# EAGLE board Main (EAGLE 9.6.2)

Size 62.23 x 49.53 mm. Coordinates in mm from the lower left corner, seen from the top.
Outline: 0,0 0,1.27
Outline: 0,1.27 0,24.13 2.54,26.67 7.62,26.67 7.62,39.37 2.54,39.37 0,41.91 0,48.26 1.27,49.53 58.42,49.53 62.23,45.72 62.23,2.54 59.69,0 1.27,0 0,1.27
Copper layers (1*16): Top 0.035mm / dielectric 1.5mm / Bottom 0.035mm
Design rules "default": minimum track width 6mil, minimum drill 0.35mm, track to track 6mil, track to pad 6mil, pad to pad 6mil, via to via 6mil, smd to smd 6mil, copper to edge 40mil, drill to drill 6mil, minimum pad ring 10mil, minimum via ring 8mil, stop-mask expansion 4mil, vias tented up to drill 0mil, thermal gap 10mil
Net classes: 1 power: width 0.203 mm

## Footprints (pad centres in the part's own frame; a part is rotated, then mirrored left to right if it is on the bottom)
0805 = smd 0.8 x 1.2: 1 -0.9,0; 2 0.9,0
C1206 = smd 1.6 x 1.8: 1 -1.4,0; 2 1.4,0
153CLV-1010 = smd 4 x 2.5: + 4,0; - -4,0
153CLV-0605 = smd 3.5 x 1.6: + 2.7,0; - -2.7,0
SOD123-2.7X1.6 = smd 1.2 x 1.02: 1 -1.635,0; 2 1.635,0
DO-214AC = smd 1.8 x 2.4: A 2.025,0; C -2.025,0
SOD80 = smd 1.4 x 1.8: 1 -1.7,0; 2 1.7,0
1X05 = drill 1.016 pad 1.88: 1 0,0; 2 2.54,0; 3 5.08,0; 4 7.62,0; 5 10.16,0
TQFP32-08 = smd 1.27 x 0.559: 1 -4.293,2.8; 2 -4.293,2; 3 -4.293,1.2; 4 -4.293,0.4; 5 -4.293,-0.4; 6 -4.293,-1.2; 7 -4.293,-2; 8 -4.293,-2.8; 17 4.293,-2.8; 18 4.293,-2; 19 4.293,-1.2; 20 4.293,-0.4; 21 4.293,0.4; 22 4.293,1.2; 23 4.293,2; 24 4.293,2.8 | smd 0.559 x 1.27: 9 -2.8,-4.293; 10 -2,-4.293; 11 -1.2,-4.293; 12 -0.4,-4.293; 13 0.4,-4.293; 14 1.2,-4.293; 15 2,-4.293; 16 2.8,-4.293; 25 2.8,4.293; 26 2,4.293; 27 1.2,4.293; 28 0.4,4.293; 29 -0.4,4.293; 30 -1.2,4.293; 31 -2,4.293; 32 -2.8,4.293
TO252 = smd 1 x 1.6: 1 -2.28,-4.8; 2 2.28,-4.8 | smd 5.4 x 6.2: TAB 0,2.5
1X07 = drill 1.016 pad 1.88: 1 0,0; 2 2.54,0; 3 5.08,0; 4 7.62,0; 5 10.16,0; 6 12.7,0; 7 15.24,0
LED3MM = drill 0.813 pad 1.676 octagon: A -1.27,0; K 1.27,0
DIL4-SMD = smd 1.6 x 2: 1 -1.27,-4.77; 2 1.27,-4.77; 3 1.27,4.77; 4 -1.27,4.77
SOT23-3 = smd 0.8 x 0.9: 1 -0.95,-1; 2 0.95,-1; 3 0,1.1
SOT23-BEC = smd 1 x 1.4: B -0.95,-1.1; C 0,1.1; E 0.95,-1.1
SOIC127P600X175-14N = smd 1.981 x 0.559: 1 -2.362,3.81; 2 -2.362,2.54; 3 -2.362,1.27; 4 -2.362,0; 5 -2.362,-1.27; 6 -2.362,-2.54; 7 -2.362,-3.81; 8 2.362,-3.81; 9 2.362,-2.54; 10 2.362,-1.27; 11 2.362,0; 12 2.362,1.27; 13 2.362,2.54; 14 2.362,3.81
16P-18.5X13.5X0.8 = smd 1.7 x 1: 1 -6.6,2.15; 2 -6.6,0.65; 3 -6.6,-0.85; 4 -6.6,-2.35; 5 -6.6,-3.85; 6 -6.6,-5.35; 7 -6.6,-6.85; 8 -6.6,-8.35; 9 6.6,-8.35; 10 6.6,-6.85; 11 6.6,-5.35; 12 6.6,-3.85; 13 6.6,-2.35; 14 6.6,-0.85; 15 6.6,0.65; 16 6.6,2.15
SOT223 = smd 1.219 x 2.235: 1 -2.311,-3.099; 2 0,-3.099; 3 2.311,-3.099 | smd 3.6 x 2.2: 4 0,3.099
SRD-05VDC-SL-C = drill 1.2 pad 2.184: COIL0 -5.39,-6.12; COIL1 -5.39,5.88; SWCLOSED 6.61,-6.12; SWCOMMON -7.39,-0.12; SWOPEN 6.61,5.88
RESONATOR-SMD = smd 0.45 x 1.905: 1 -1.2,0; 2 0,0; 3 1.2,0

## Placement (x,y rotation side)
C1  0.1uF  [0805]  33.02,36.83 0 top
C2  10uF  [C1206]  22.86,21.59 0 top
C3  0.1uF  [0805]  33.02,39.37 0 top
C4  22uF  [C1206]  54.61,22.86 90 top
C5  4.7uF  [C1206]  29.21,17.78 180 top
C6  0.1uF  [0805]  33.02,41.91 0 top
C7  0.1uF  [0805]  33.02,44.45 0 top
C8  0.1uF  [0805]  29.21,44.45 0 top
C9  0.1  [0805]  25.4,44.45 0 top
C10  220/50  [153CLV-1010]  41.91,41.91 0 top
C11  100/35  [153CLV-0605]  53.34,43.18 0 top
C12  0.1uF  [0805]  21.59,44.45 0 top
C13  0.1uF  [0805]  17.78,44.45 0 top
C14  0.1uF  [0805]  33.02,46.99 0 top
C18  0.1  [0805]  29.21,46.99 0 top
D1  SMF5.0A  [SOD123-2.7X1.6]  29.21,22.86 90 top
D2  SMF5.0A  [SOD123-2.7X1.6]  45.72,22.86 90 top
D4  SZ105B  [DO-214AC]  49.53,22.86 90 top
D12  4148  [SOD80]  29.21,13.97 180 top
ECU  [1X05]  59.69,15.24 270 top
IC1  MEGA8-AI  [TQFP32-08]  13.97,16.51 45 top
IC2  LM1117DTX-5.0  [TO252]  39.37,31.75 90 top
JP1  [1X07]  3.81,7.62 90 top
JP2  [1X05]  7.62,5.08 0 top
LED1  BT_STATE  [LED3MM]  8.89,45.72 90 top
LED2  PW  [LED3MM]  3.81,45.72 90 top
LED3  RY  [LED3MM]  13.97,45.72 90 top
OK1  PC817  [DIL4-SMD]  26.67,8.89 270 top
Q3  BSS138BK  [SOT23-3]  24.13,38.1 0 top
Q4  BSS138BK  [SOT23-3]  24.13,29.21 0 top
R1  10k  [0805]  24.13,35.56 180 top
R2  10k  [0805]  43.18,22.86 90 top
R3  10k  [0805]  24.13,26.67 180 top
R4  10k  [0805]  24.13,33.02 180 top
R5  1k  [0805]  8.89,24.13 0 top
R6  1k  [0805]  16.51,24.13 0 top
R7  1k  [0805]  12.7,24.13 0 top
R9  10k  [0805]  3.81,41.91 0 top
R10  10k  [0805]  27.94,38.1 0 top
R11  10k  [0805]  27.94,35.56 0 top
R12  330  [0805]  25.4,46.99 0 top
R13  4.7k  [0805]  27.94,33.02 0 top
R14  1k  [0805]  27.94,30.48 0 top
R15  2.2k  [0805]  27.94,27.94 0 top
R16  1k  [0805]  7.62,41.91 0 top
R17  1k  [0805]  21.59,46.99 0 top
R18  3.9k  [0805]  17.78,46.99 0 top
SENSOR  [1X05]  59.69,39.37 270 top
T3  BC817  [SOT23-BEC]  30.48,3.81 270 top
U1  MCP4922-E/SL  [SOIC127P600X175-14N]  36.83,22.86 90 top
U2  HM-11  [16P-18.5X13.5X0.8]  11.43,33.02 90 top
U4  LM1117 3.3  [SOT223]  50.8,31.75 180 top
U$10  RELAYPTH  [SRD-05VDC-SL-C]  43.18,10.16 0 top
Y1  16MHZ  [RESONATOR-SMD]  8.89,10.16 315 top

## Library data of the parts
C1 = SparkFun-Capacitors
C2 C4 C5 C10 C11 LED1-LED3 = adafruit
C3 C6-C9 C12-C14 C18 R12 R17 R18 = SparkFun-Passives
D1 D2 = discrete
D4 = diode
D12 = semicon-smd-ipc
ECU JP1 JP2 SENSOR = SparkFun
IC1 = atmel; MPN: ATMEGA8-16AU; OC_FARNELL: 9171371; OC_NEWARK: 73M8863
IC2 = lm1117
OK1 = optocoupler
Q3 Q4 = SparkFun-DiscreteSemi; PROD_ID: TRANS-00830
R1-R7 R9-R11 R13-R16 = SparkFun-Resistors
T3 = transistor
U1 = Microchip_By_element14_Batch_1; MPN: MCP4922-E/SL; OC_FARNELL: 1332114; OC_NEWARK: 08J8748; PACKAGE: SOIC14; SUPPLIER: Microchip
U2 = template
U4 = SparkFun-PowerIC; PROD_ID: VREG-08170
U$10 = SRD-05VDC-SL-C
Y1 = SparkFun-FreqCtrl; PROD_ID: XTAL-08900

## Nets
3.3V: C1.1 C2.1 C3.1 C4.1 Q3.1 Q4.1 R1.2 R3.2 R16.1 U2.9 U4.2 U4.4
12V: C10.+ C12.1 ECU.1 IC2.2 SENSOR.1
14: ECU.3 U1.14
A0: C18.1 D4.C IC1.23 R13.1 R15.2
A1: IC1.24 R6.2 U2.15
A2: IC1.25 JP1.3
A3: IC1.26 JP1.4
CS: IC1.14 U1.3
D2: IC1.32 JP1.5
D3: IC1.1 JP1.6
D4: IC1.2 JP1.7
D5: IC1.9 R12.1
D6: IC1.10
D7: IC1.11 R11.1 U1.8
D8: D2.2 IC1.12 Q3.3 R2.1
D9: D1.2 IC1.13 Q4.3 R4.1
GND: C1.2 C2.2 C3.2 C4.2 C5.2 C6.1 C7.1 C9.2 C10.- C11.- C12.2 C13.2 C14.2 C18.2 D1.1 D2.1 D4.A ECU.2 IC1.3 IC1.5 IC1.21 IC2.1 JP1.2 JP2.4 LED1.K LED3.K R14.2 R15.1 R18.1 SENSOR.2 T3.E U1.12 U2.12 U4.1 Y1.2
MISO: IC1.16
MOSI: IC1.15 U1.5
N$1: LED1.A R6.1
N$2: R16.2 U2.16
N$3: R5.1 U2.2
N$5: IC1.8 Y1.3
N$6: R7.1 U2.4
N$7: IC1.7 Y1.1
N$8: C7.2 IC1.20
N$9: ECU.5 SENSOR.5
N$10: C8.1 JP2.1
N$12: LED2.K R14.1
N$16: R10.1 U1.9
N$20: OK1.3 R17.1
N$21: R17.2 R18.2 T3.B
N$22: D12.2 T3.C U$10.COIL0
N$23: OK1.1 R12.2
N$31: LED3.A OK1.2
RST: C8.2 IC1.29 R9.1
RXD: IC1.30 JP2.2
RXD1: Q4.2 R3.1 R7.2
SCK: IC1.17 U1.4
SCL: IC1.28
SDA: IC1.27
SE: ECU.4 U$10.SWCOMMON
SENS_IN: R13.2 SENSOR.3
SS: SENSOR.4 U$10.SWCLOSED
TXD: IC1.31 JP2.3
TXD1: Q3.2 R1.1 R5.2
VCC: C5.1 C6.2 C9.1 C11.+ C13.1 C14.1 D12.1 IC1.4 IC1.6 IC1.18 IC2.TAB JP1.1 JP2.5 LED2.A OK1.4 R2.2 R4.2 R9.2 R10.2 R11.2 U1.1 U1.11 U1.13 U4.3 U$10.COIL1

## Tracks (layer width: path | path; a pad name or v marks a point on that pad's centre or on a via)
3.3V  (11 unrouted)
12V  (4 unrouted)
14  (1 unrouted)
A0  (4 unrouted)
A1  (2 unrouted)
A2  (1 unrouted)
A3  (1 unrouted)
CS  (1 unrouted)
D2  (1 unrouted)
D3  (1 unrouted)
D4  (1 unrouted)
D5  (1 unrouted)
D7  (2 unrouted)
D8  (3 unrouted)
D9  (3 unrouted)
GND  (34 unrouted)
MOSI  (1 unrouted)
N$1  (1 unrouted)
N$2  (1 unrouted)
N$3  (1 unrouted)
N$5  (1 unrouted)
N$6  (1 unrouted)
N$7  (1 unrouted)
N$8  (1 unrouted)
N$9  (1 unrouted)
N$10  (1 unrouted)
N$12  (1 unrouted)
N$16  (1 unrouted)
N$20  (1 unrouted)
N$21  (2 unrouted)
N$22  (2 unrouted)
N$23  (1 unrouted)
N$31  (1 unrouted)
RST  (2 unrouted)
RXD  (1 unrouted)
RXD1  (2 unrouted)
SCK  (1 unrouted)
SE  (1 unrouted)
SENS_IN  (1 unrouted)
SS  (1 unrouted)
TXD  (1 unrouted)
TXD1  (2 unrouted)
VCC  (24 unrouted)